# EAGLE board print_v2 (EAGLE 6.5.0)
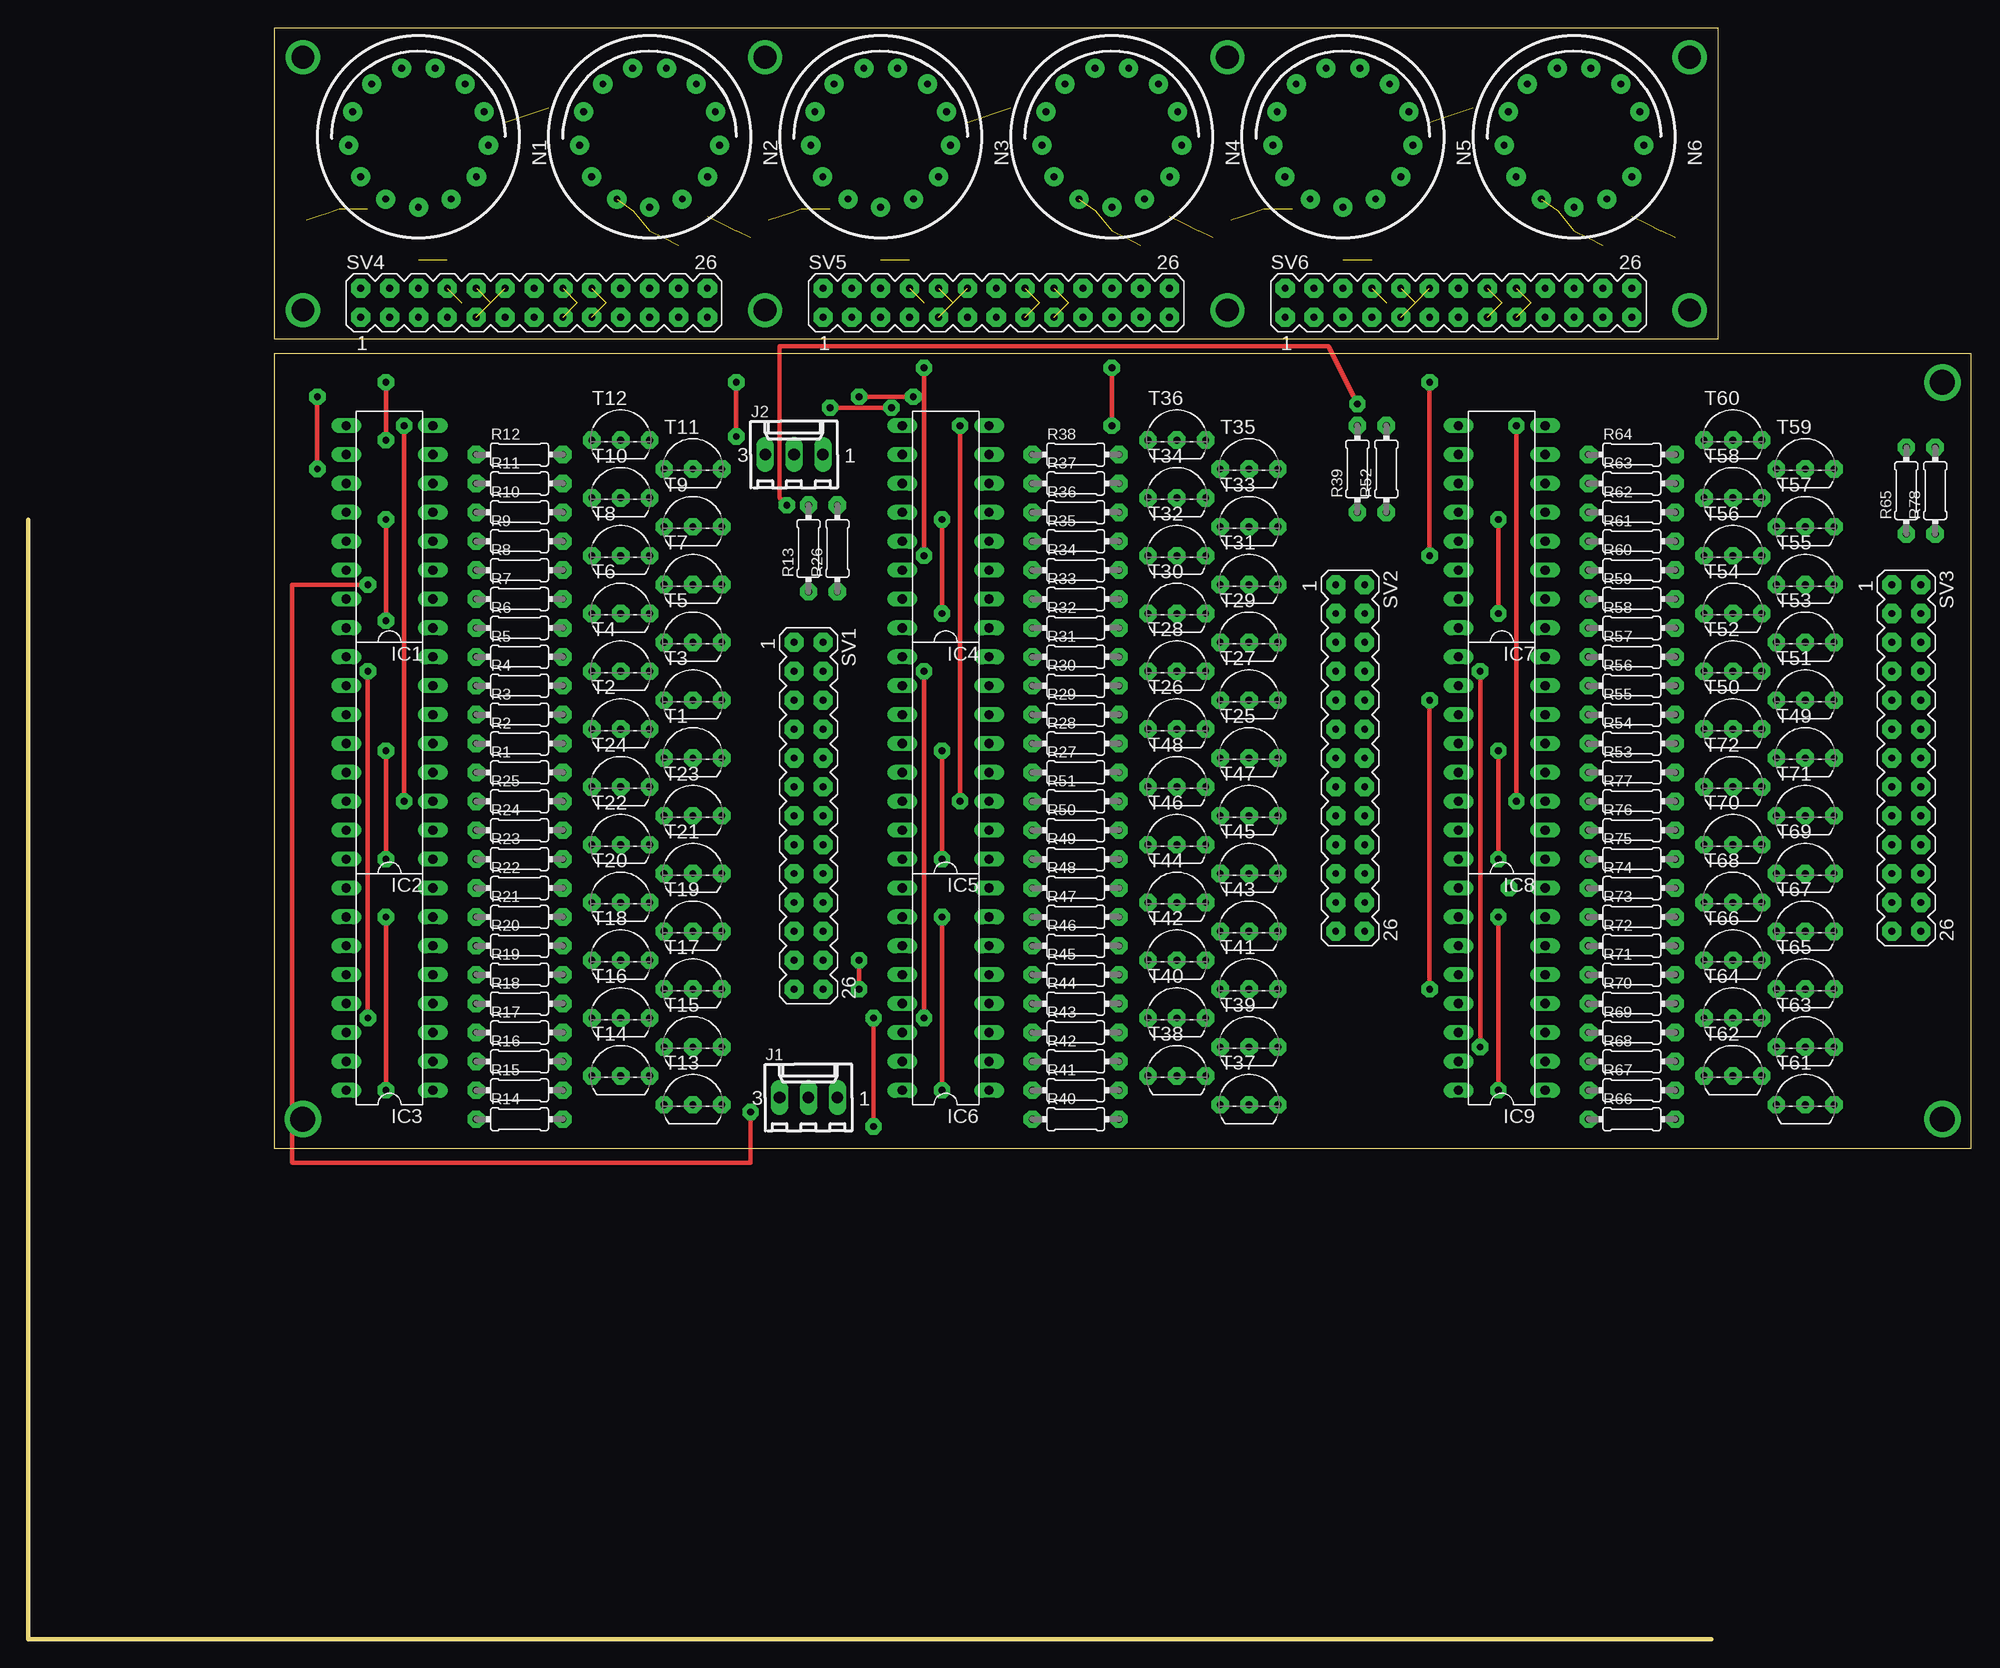
[diagram p0: board, top side]
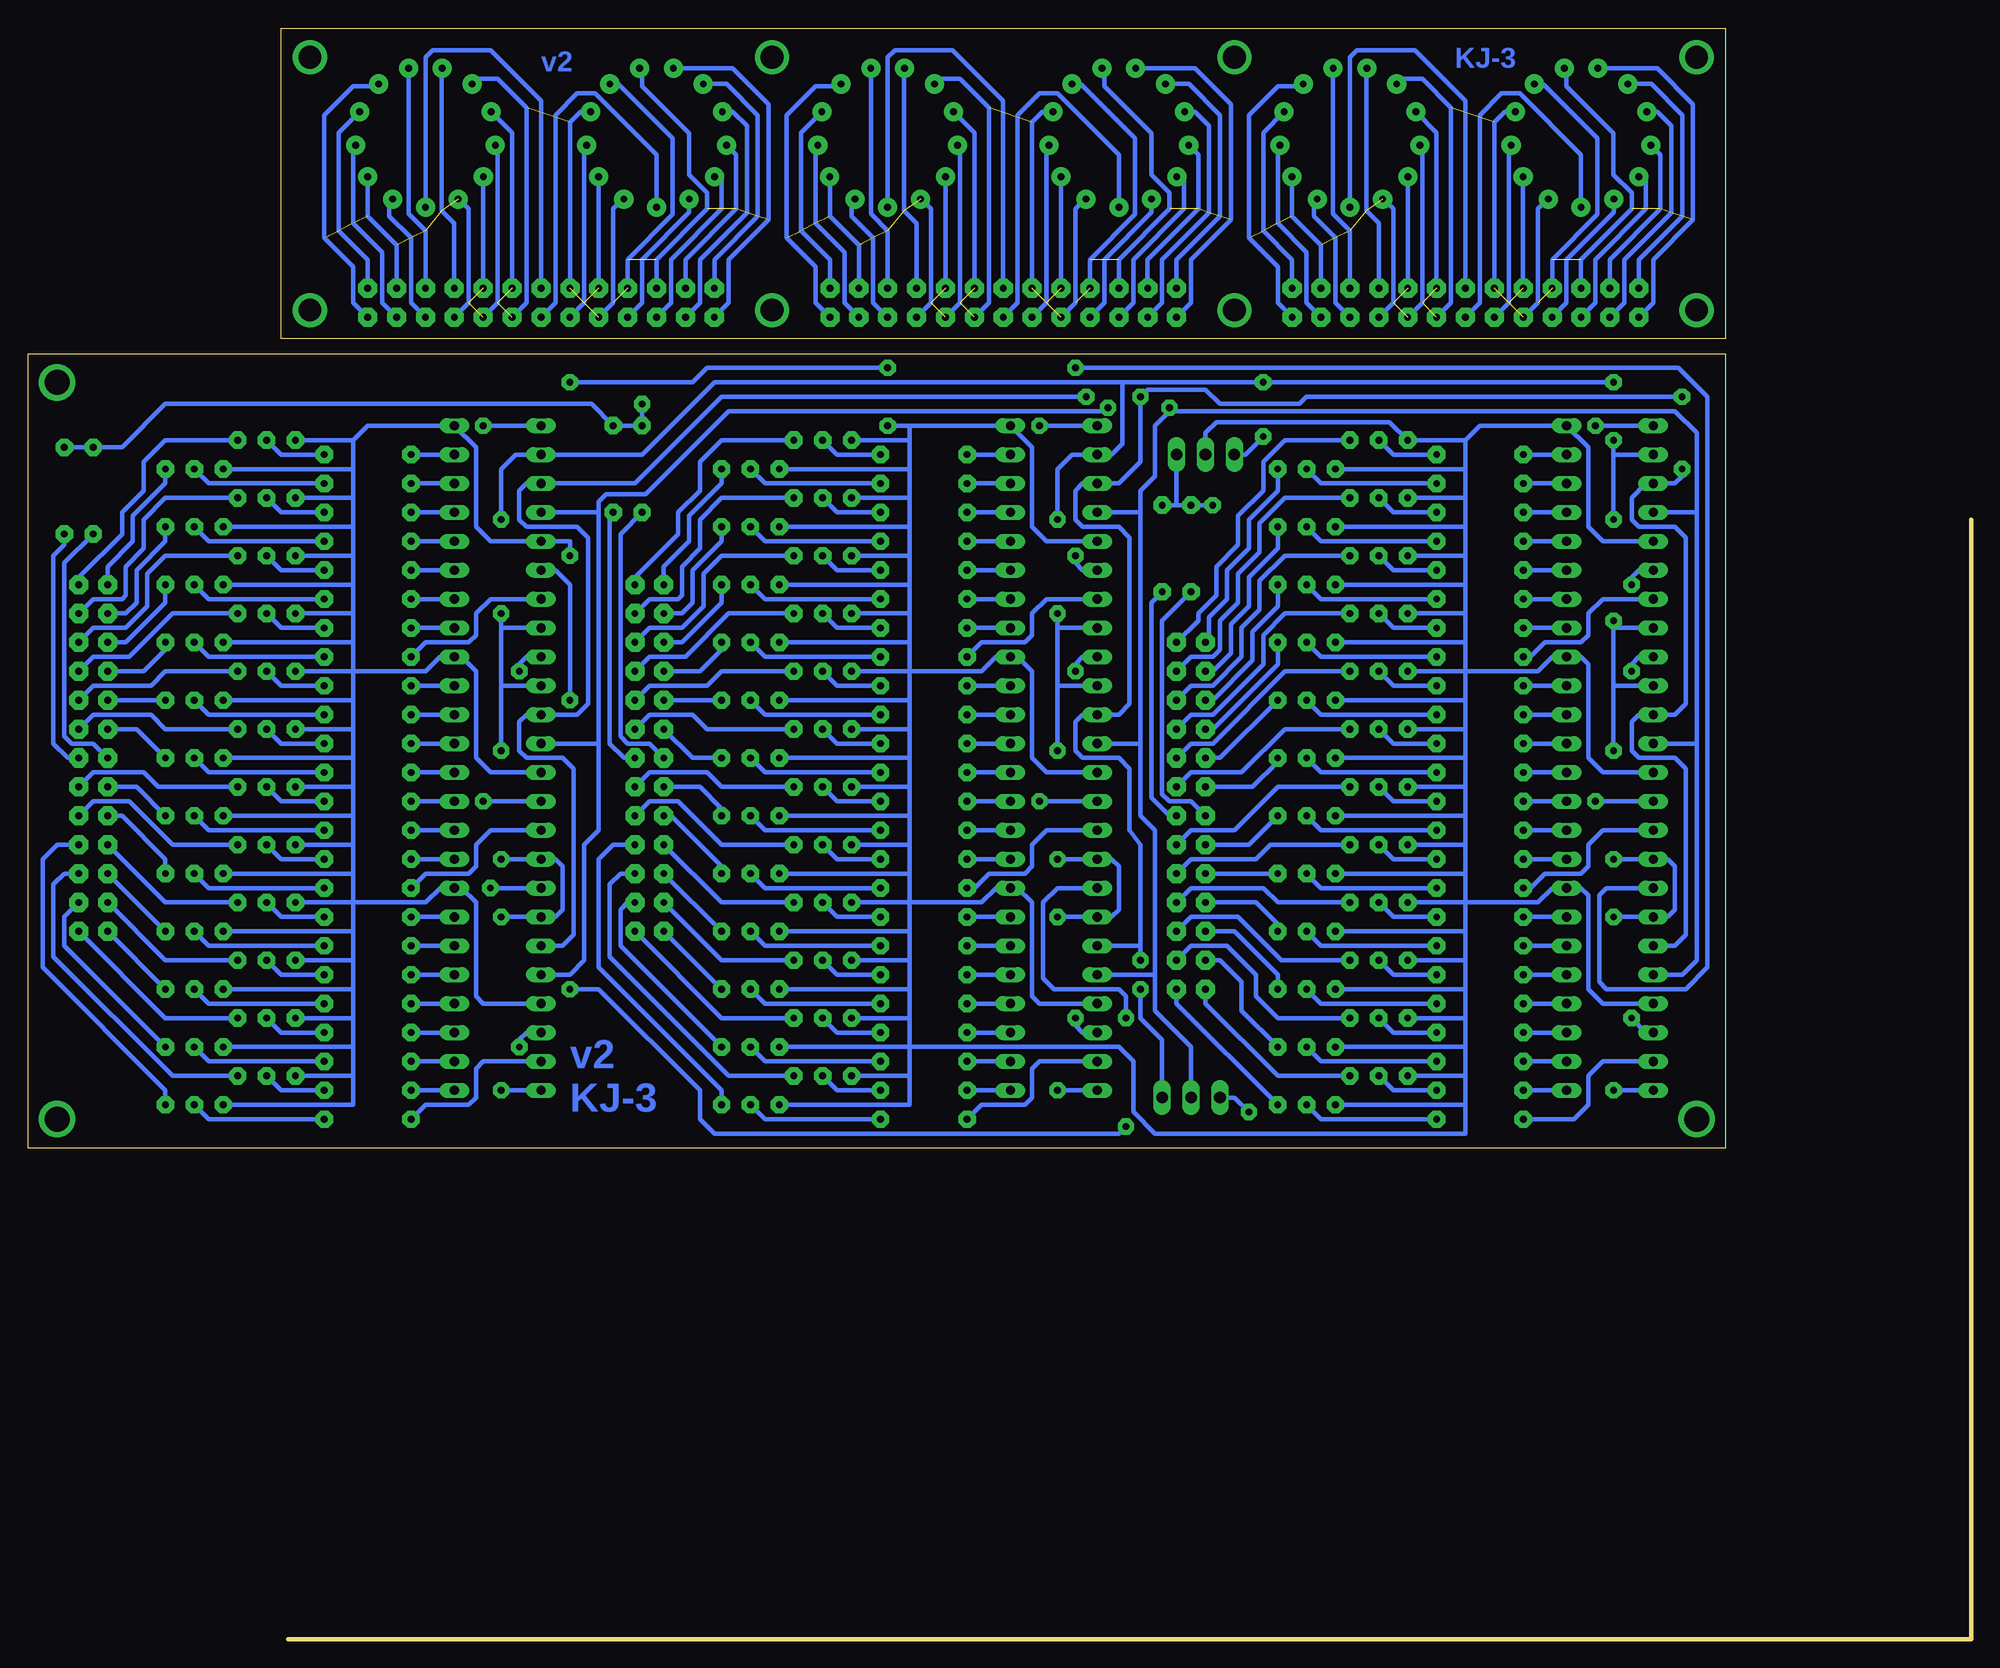
[diagram p1: board, bottom side, seen from below]

Size 170.79 x 141.59 mm. Coordinates in mm from the lower left corner, seen from the top.
Outline: 0,98.43 0,0 147.96,0
Outline: 21.59,43.18 170.79,43.18 170.79,113.02 21.59,113.02 21.59,43.18
Outline: 21.59,114.3 148.58,114.3 148.58,141.59 21.59,141.59 21.59,114.3
Copper layers (1*16): Top 0.035mm / dielectric 1.5mm / Bottom 0.035mm
Design rules "default": minimum track width 10mil, minimum drill 24mil, track to track 8mil, track to pad 8mil, pad to pad 8mil, via to via 8mil, smd to smd 8mil, copper to edge 40mil, drill to drill 8mil, minimum pad ring 10mil, minimum via ring 8mil, stop-mask expansion 4mil, vias tented up to drill 0mil, thermal gap 10mil

## Footprints (pad centres in the part's own frame; a part is rotated, then mirrored left to right if it is on the bottom)
DIL16 = drill 0.813 long: 1 -8.89,-3.81; 2 -6.35,-3.81; 3 -3.81,-3.81; 4 -1.27,-3.81; 5 1.27,-3.81; 6 3.81,-3.81; 7 6.35,-3.81; 8 8.89,-3.81; 9 8.89,3.81; 10 6.35,3.81; 11 3.81,3.81; 12 1.27,3.81; 13 -1.27,3.81; 14 -3.81,3.81; 15 -6.35,3.81; 16 -8.89,3.81
6410-03 = drill 1.016 long: 1 2.54,0; 2 0,0; 3 -2.54,0
IN-14 = drill 0.6 pad 1.676: 0 5.094,-3.516; 1 -5.094,-3.516; 2 -6.145,-0.746; 3 -5.788,2.195; 4 -4.105,4.633; 5 -1.481,6.01; 6 1.481,6.01; 7 4.105,4.633; 8 5.788,2.195; 9 6.145,-0.746; A 0,-6.19; LHDP 2.877,-5.481; RHDP -2.877,-5.481
0204/7 = drill 0.6 pad 1.524 octagon: 1 -3.81,0; 2 3.81,0
MA13-2 = drill 0.6 pad 1.676 octagon: 1 -15.24,-1.27; 2 -15.24,1.27; 3 -12.7,-1.27; 4 -12.7,1.27; 5 -10.16,-1.27; 6 -10.16,1.27; 7 -7.62,-1.27; 8 -7.62,1.27; 9 -5.08,-1.27; 10 -5.08,1.27; 11 -2.54,-1.27; 12 -2.54,1.27; 13 0,-1.27; 14 0,1.27; 15 2.54,-1.27; 16 2.54,1.27; 17 5.08,-1.27; 18 5.08,1.27; 19 7.62,-1.27; 20 7.62,1.27; 21 10.16,-1.27; 22 10.16,1.27; 23 12.7,-1.27; 24 12.7,1.27; 25 15.24,-1.27; 26 15.24,1.27
TO92-EBC = drill 0.6 pad 1.524 octagon: B 0,-1.27; C 2.54,-1.27; E -2.54,-1.27

## Placement (x,y rotation side)
IC1  74LS595N  [DIL16]  31.75,97.79 90 top
IC2  74LS595N  [DIL16]  31.75,77.47 90 top
IC3  74LS595N  [DIL16]  31.75,57.15 90 top
IC4  74LS595N  [DIL16]  80.64,97.79 90 top
IC5  74LS595N  [DIL16]  80.64,77.47 90 top
IC6  74LS595N  [DIL16]  80.64,57.15 90 top
IC7  74LS595N  [DIL16]  129.54,97.79 90 top
IC8  74LS595N  [DIL16]  129.54,77.47 90 top
IC9  74LS595N  [DIL16]  129.54,57.15 90 top
J1  22-27-2031-03  [6410-03]  68.58,47.62 0 top
J2  22-27-2031-03  [6410-03]  67.31,104.14 0 top
N1  IN-14  [IN-14]  34.29,132.08 0 top
N2  IN-14  [IN-14]  54.61,132.08 0 top
N3  IN-14  [IN-14]  74.93,132.08 0 top
N4  IN-14  [IN-14]  95.25,132.08 0 top
N5  IN-14  [IN-14]  115.57,132.08 0 top
N6  IN-14  [IN-14]  135.89,132.08 0 top
R1  [0204/7]  43.18,76.2 0 top
R2  [0204/7]  43.18,78.74 0 top
R3  [0204/7]  43.18,81.28 0 top
R4  [0204/7]  43.18,83.82 0 top
R5  [0204/7]  43.18,86.36 0 top
R6  [0204/7]  43.18,88.9 0 top
R7  [0204/7]  43.18,91.44 0 top
R8  [0204/7]  43.18,93.98 0 top
R9  [0204/7]  43.18,96.52 0 top
R10  [0204/7]  43.18,99.06 0 top
R11  [0204/7]  43.18,101.6 0 top
R12  [0204/7]  43.18,104.14 0 top
R13  [0204/7]  68.58,95.89 90 top
R14  [0204/7]  43.18,45.72 0 top
R15  [0204/7]  43.18,48.26 0 top
R16  [0204/7]  43.18,50.8 0 top
R17  [0204/7]  43.18,53.34 0 top
R18  [0204/7]  43.18,55.88 0 top
R19  [0204/7]  43.18,58.42 0 top
R20  [0204/7]  43.18,60.96 0 top
R21  [0204/7]  43.18,63.5 0 top
R22  [0204/7]  43.18,66.04 0 top
R23  [0204/7]  43.18,68.58 0 top
R24  [0204/7]  43.18,71.12 0 top
R25  [0204/7]  43.18,73.66 0 top
R26  [0204/7]  71.12,95.89 90 top
R27  [0204/7]  92.08,76.2 0 top
R28  [0204/7]  92.08,78.74 0 top
R29  [0204/7]  92.08,81.28 0 top
R30  [0204/7]  92.08,83.82 0 top
R31  [0204/7]  92.08,86.36 0 top
R32  [0204/7]  92.08,88.9 0 top
R33  [0204/7]  92.08,91.44 0 top
R34  [0204/7]  92.08,93.98 0 top
R35  [0204/7]  92.08,96.52 0 top
R36  [0204/7]  92.08,99.06 0 top
R37  [0204/7]  92.08,101.6 0 top
R38  [0204/7]  92.08,104.14 0 top
R39  [0204/7]  116.84,102.87 90 top
R40  [0204/7]  92.08,45.72 0 top
R41  [0204/7]  92.08,48.26 0 top
R42  [0204/7]  92.08,50.8 0 top
R43  [0204/7]  92.08,53.34 0 top
R44  [0204/7]  92.08,55.88 0 top
R45  [0204/7]  92.08,58.42 0 top
R46  [0204/7]  92.08,60.96 0 top
R47  [0204/7]  92.08,63.5 0 top
R48  [0204/7]  92.08,66.04 0 top
R49  [0204/7]  92.08,68.58 0 top
R50  [0204/7]  92.08,71.12 0 top
R51  [0204/7]  92.08,73.66 0 top
R52  [0204/7]  119.38,102.87 90 top
R53  [0204/7]  140.97,76.2 0 top
R54  [0204/7]  140.97,78.74 0 top
R55  [0204/7]  140.97,81.28 0 top
R56  [0204/7]  140.97,83.82 0 top
R57  [0204/7]  140.97,86.36 0 top
R58  [0204/7]  140.97,88.9 0 top
R59  [0204/7]  140.97,91.44 0 top
R60  [0204/7]  140.97,93.98 0 top
R61  [0204/7]  140.97,96.52 0 top
R62  [0204/7]  140.97,99.06 0 top
R63  [0204/7]  140.97,101.6 0 top
R64  [0204/7]  140.97,104.14 0 top
R65  [0204/7]  165.1,100.97 90 top
R66  [0204/7]  140.97,45.72 0 top
R67  [0204/7]  140.97,48.26 0 top
R68  [0204/7]  140.97,50.8 0 top
R69  [0204/7]  140.97,53.34 0 top
R70  [0204/7]  140.97,55.88 0 top
R71  [0204/7]  140.97,58.42 0 top
R72  [0204/7]  140.97,60.96 0 top
R73  [0204/7]  140.97,63.5 0 top
R74  [0204/7]  140.97,66.04 0 top
R75  [0204/7]  140.97,68.58 0 top
R76  [0204/7]  140.97,71.12 0 top
R77  [0204/7]  140.97,73.66 0 top
R78  [0204/7]  167.64,100.97 90 top
SV1  [MA13-2]  68.58,72.39 270 top
SV2  [MA13-2]  116.2,77.47 270 top
SV3  [MA13-2]  165.1,77.47 270 top
SV4  [MA13-2]  44.45,117.48 0 top
SV5  [MA13-2]  85.09,117.48 0 top
SV6  [MA13-2]  125.73,117.48 0 top
T1  [TO92-EBC]  58.42,78.74 0 top
T2  [TO92-EBC]  52.07,81.28 0 top
T3  [TO92-EBC]  58.42,83.82 0 top
T4  [TO92-EBC]  52.07,86.36 0 top
T5  [TO92-EBC]  58.42,88.9 0 top
T6  [TO92-EBC]  52.07,91.44 0 top
T7  [TO92-EBC]  58.42,93.98 0 top
T8  [TO92-EBC]  52.07,96.52 0 top
T9  [TO92-EBC]  58.42,99.06 0 top
T10  [TO92-EBC]  52.07,101.6 0 top
T11  [TO92-EBC]  58.42,104.14 0 top
T12  [TO92-EBC]  52.07,106.68 0 top
T13  [TO92-EBC]  58.42,48.26 0 top
T14  [TO92-EBC]  52.07,50.8 0 top
T15  [TO92-EBC]  58.42,53.34 0 top
T16  [TO92-EBC]  52.07,55.88 0 top
T17  [TO92-EBC]  58.42,58.42 0 top
T18  [TO92-EBC]  52.07,60.96 0 top
T19  [TO92-EBC]  58.42,63.5 0 top
T20  [TO92-EBC]  52.07,66.04 0 top
T21  [TO92-EBC]  58.42,68.58 0 top
T22  [TO92-EBC]  52.07,71.12 0 top
T23  [TO92-EBC]  58.42,73.66 0 top
T24  [TO92-EBC]  52.07,76.2 0 top
T25  [TO92-EBC]  107.31,78.74 0 top
T26  [TO92-EBC]  100.97,81.28 0 top
T27  [TO92-EBC]  107.31,83.82 0 top
T28  [TO92-EBC]  100.97,86.36 0 top
T29  [TO92-EBC]  107.31,88.9 0 top
T30  [TO92-EBC]  100.97,91.44 0 top
T31  [TO92-EBC]  107.31,93.98 0 top
T32  [TO92-EBC]  100.97,96.52 0 top
T33  [TO92-EBC]  107.31,99.06 0 top
T34  [TO92-EBC]  100.97,101.6 0 top
T35  [TO92-EBC]  107.31,104.14 0 top
T36  [TO92-EBC]  100.97,106.68 0 top
T37  [TO92-EBC]  107.31,48.26 0 top
T38  [TO92-EBC]  100.97,50.8 0 top
T39  [TO92-EBC]  107.31,53.34 0 top
T40  [TO92-EBC]  100.97,55.88 0 top
T41  [TO92-EBC]  107.31,58.42 0 top
T42  [TO92-EBC]  100.97,60.96 0 top
T43  [TO92-EBC]  107.31,63.5 0 top
T44  [TO92-EBC]  100.97,66.04 0 top
T45  [TO92-EBC]  107.31,68.58 0 top
T46  [TO92-EBC]  100.97,71.12 0 top
T47  [TO92-EBC]  107.31,73.66 0 top
T48  [TO92-EBC]  100.97,76.2 0 top
T49  [TO92-EBC]  156.21,78.74 0 top
T50  [TO92-EBC]  149.86,81.28 0 top
T51  [TO92-EBC]  156.21,83.82 0 top
T52  [TO92-EBC]  149.86,86.36 0 top
T53  [TO92-EBC]  156.21,88.9 0 top
T54  [TO92-EBC]  149.86,91.44 0 top
T55  [TO92-EBC]  156.21,93.98 0 top
T56  [TO92-EBC]  149.86,96.52 0 top
T57  [TO92-EBC]  156.21,99.06 0 top
T58  [TO92-EBC]  149.86,101.6 0 top
T59  [TO92-EBC]  156.21,104.14 0 top
T60  [TO92-EBC]  149.86,106.68 0 top
T61  [TO92-EBC]  156.21,48.26 0 top
T62  [TO92-EBC]  149.86,50.8 0 top
T63  [TO92-EBC]  156.21,53.34 0 top
T64  [TO92-EBC]  149.86,55.88 0 top
T65  [TO92-EBC]  156.21,58.42 0 top
T66  [TO92-EBC]  149.86,60.96 0 top
T67  [TO92-EBC]  156.21,63.5 0 top
T68  [TO92-EBC]  149.86,66.04 0 top
T69  [TO92-EBC]  156.21,68.58 0 top
T70  [TO92-EBC]  149.86,71.12 0 top
T71  [TO92-EBC]  156.21,73.66 0 top
T72  [TO92-EBC]  149.86,76.2 0 top

## Library data of the parts
IC1-IC9 = 74xx-us
J1 J2 = con-molex; OC_FARNELL: unknown; OC_NEWARK: unknown
N1-N6 = russian-nixies
R1-R78 = resistor
SV1-SV6 = con-lstb; OC_FARNELL: unknown; OC_NEWARK: unknown
T1-T72 = transistor

## Nets
GND: IC1.8 IC1.13 IC2.8 IC2.13 IC3.8 IC3.13 IC4.8 IC4.13 IC5.8 IC5.13 IC6.8 IC6.13 IC7.8 IC7.13 IC8.8 IC8.13 IC9.8 IC9.13 J2.2 T1.E T2.E T3.E T4.E T5.E T6.E T7.E T8.E T9.E T10.E T11.E T12.E T13.E T14.E T15.E T16.E T17.E T18.E T19.E T20.E T21.E T22.E T23.E T24.E T25.E T26.E T27.E T28.E T29.E T30.E T31.E T32.E T33.E T34.E T35.E T36.E T37.E T38.E T39.E T40.E T41.E T42.E T43.E T44.E T45.E T46.E T47.E T48.E T49.E T50.E T51.E T52.E T53.E T54.E T55.E T56.E T57.E T58.E T59.E T60.E T61.E T62.E T63.E T64.E T65.E T66.E T67.E T68.E T69.E T70.E T71.E T72.E
HV: J2.1 R13.2 R26.2 R39.2 R52.2 R65.2 R78.2
N$1: R12.2 T12.B
N$2: R11.2 T11.B
N$3: R10.2 T10.B
N$4: R9.2 T9.B
N$5: R8.2 T8.B
N$6: R7.2 T7.B
N$7: R6.2 T6.B
N$8: R5.2 T5.B
N$9: R4.2 T4.B
N$10: R3.2 T3.B
N$11: R2.2 T2.B
N$12: R1.2 T1.B
N$13: SV1.11 T1.C
N$14: R38.2 T36.B
N$15: R37.2 T35.B
N$16: SV1.3 T9.C
N$17: SV1.6 T8.C
N$18: SV1.5 T7.C
N$19: R36.2 T34.B
N$20: SV1.12 T2.C
N$21: SV1.9 T3.C
N$22: SV1.8 T6.C
N$23: SV1.7 T5.C
N$24: SV1.10 T4.C
N$25: R26.1 SV1.14
N$26: R25.2 T24.B
N$27: R24.2 T23.B
N$28: R23.2 T22.B
N$29: R22.2 T21.B
N$30: R21.2 T20.B
N$31: R20.2 T19.B
N$32: R19.2 T18.B
N$33: R18.2 T17.B
N$34: R17.2 T16.B
N$35: R16.2 T15.B
N$36: R15.2 T14.B
N$37: R14.2 T13.B
N$38: SV1.16 T24.C
N$39: SV1.15 T23.C
N$40: SV1.18 T22.C
N$41: SV1.17 T21.C
N$42: SV1.20 T20.C
N$43: SV1.19 T19.C
N$44: SV1.26 T13.C
N$45: SV1.25 T14.C
N$46: SV1.23 T15.C
N$47: SV1.22 T18.C
N$48: SV1.21 T17.C
N$49: SV1.24 T16.C
N$51: R13.1 SV1.13
N$52: IC1.9 IC2.14
N$53: IC2.9 IC3.14
N$54: IC3.9 IC4.14
N$56: R35.2 T33.B
N$57: SV1.2 T12.C
N$60: SV1.1 T11.C
N$61: SV1.4 T10.C
N$62: R34.2 T32.B
N$63: R33.2 T31.B
N$64: R32.2 T30.B
N$65: R31.2 T29.B
N$66: R30.2 T28.B
N$67: R29.2 T27.B
N$68: R28.2 T26.B
N$69: R27.2 T25.B
N$70: SV2.3 T33.C
N$71: SV2.6 T32.C
N$72: SV2.5 T31.C
N$73: SV2.12 T26.C
N$74: SV2.9 T27.C
N$75: IC1.7 R12.1
N$76: IC1.6 R11.1
N$77: IC1.5 R10.1
N$78: IC1.4 R9.1
N$79: IC1.3 R8.1
N$80: IC1.2 R7.1
N$81: IC1.1 R6.1
N$82: IC1.15 R5.1
N$83: SV2.8 T30.C
N$84: IC2.7 R4.1
N$85: IC2.6 R3.1
N$86: IC2.5 R2.1
N$87: IC2.4 R1.1
N$88: IC2.3 R25.1
N$89: IC2.2 R24.1
N$90: IC2.1 R23.1
N$91: IC2.15 R22.1
N$92: IC3.7 R21.1
N$93: IC3.6 R20.1
N$94: IC3.5 R19.1
N$95: IC3.4 R18.1
N$96: IC3.3 R17.1
N$97: IC3.2 R16.1
N$98: IC3.1 R15.1
N$99: IC3.15 R14.1
N$100: SV2.7 T29.C
N$101: SV2.10 T28.C
N$102: R51.2 T48.B
N$103: R50.2 T47.B
N$104: R49.2 T46.B
N$105: R48.2 T45.B
N$106: R47.2 T44.B
N$107: R46.2 T43.B
N$108: R45.2 T42.B
N$109: R44.2 T41.B
N$110: R43.2 T40.B
N$111: R42.2 T39.B
N$112: R41.2 T38.B
N$113: R40.2 T37.B
N$114: SV2.16 T48.C
N$115: SV2.15 T47.C
N$116: SV2.18 T46.C
N$117: SV2.17 T45.C
N$118: SV2.19 T44.C
N$119: SV2.21 T43.C
N$120: SV2.20 T37.C
N$121: SV2.22 T38.C
N$122: SV2.24 T39.C
N$123: SV2.23 T42.C
N$124: SV2.25 T41.C
N$125: SV2.26 T40.C
N$126: IC4.7 R38.1
N$127: IC4.6 R37.1
N$128: IC4.5 R36.1
N$129: IC4.4 R35.1
N$130: IC4.3 R34.1
N$131: IC4.2 R33.1
N$132: IC4.1 R32.1
N$133: IC4.15 R31.1
N$134: IC5.7 R30.1
N$135: IC5.6 R29.1
N$136: IC5.5 R28.1
N$137: IC5.4 R27.1
N$138: IC5.3 R51.1
N$139: IC5.2 R50.1
N$140: IC5.1 R49.1
N$141: IC5.15 R48.1
N$142: IC6.7 R47.1
N$143: IC6.6 R46.1
N$144: IC6.5 R45.1
N$145: IC6.4 R44.1
N$146: IC6.3 R43.1
N$147: IC6.2 R42.1
N$148: IC6.1 R41.1
N$149: IC6.15 R40.1
N$150: N1.A SV4.13
N$151: IC4.9 IC5.14
N$152: IC5.9 IC6.14
N$153: IC6.9 IC7.14
N$154: N2.A SV4.14
N$155: N1.0 N1.1 N1.2 N1.3 N1.4 N1.5 N1.6 N1.7 N1.8 N1.9 N1.LHDP N1.RHDP N2.0 N2.1 N2.2 N2.3 N2.4 N2.5 N2.6 N2.7 N2.8 N2.9 N2.LHDP N2.RHDP SV4.1 SV4.2 SV4.3 SV4.4 SV4.5 SV4.6 SV4.7 SV4.8 SV4.9 SV4.10 SV4.11 SV4.12 SV4.15 SV4.16 SV4.17 SV4.18 SV4.19 SV4.20 SV4.21 SV4.22 SV4.23 SV4.24 SV4.25 SV4.26
N$157: SV2.11 T25.C
N$158: R52.1 SV2.14
N$159: R39.1 SV2.13
N$160: SV2.2 T36.C
N$161: SV2.1 T35.C
N$162: SV2.4 T34.C
N$163: R64.2 T60.B
N$164: R63.2 T59.B
N$165: R62.2 T58.B
N$166: R61.2 T57.B
N$167: R60.2 T56.B
N$168: R59.2 T55.B
N$169: R58.2 T54.B
N$170: R57.2 T53.B
N$171: R56.2 T52.B
N$172: R55.2 T51.B
N$173: R54.2 T50.B
N$174: R53.2 T49.B
N$175: SV3.3 T57.C
N$176: SV3.6 T56.C
N$177: SV3.5 T55.C
N$178: SV3.12 T50.C
N$179: SV3.9 T51.C
N$180: SV3.8 T54.C
N$181: SV3.7 T53.C
N$182: SV3.10 T52.C
N$183: R77.2 T72.B
N$184: R76.2 T71.B
N$185: R75.2 T70.B
N$186: R74.2 T69.B
N$187: R73.2 T68.B
N$188: R72.2 T67.B
N$189: R71.2 T66.B
N$190: R70.2 T65.B
N$191: R69.2 T64.B
N$192: R68.2 T63.B
N$193: R67.2 T62.B
N$194: R66.2 T61.B
N$195: SV3.16 T72.C
N$196: SV3.15 T71.C
N$197: SV3.18 T70.C
N$198: SV3.17 T69.C
N$199: SV3.19 T68.C
N$200: SV3.21 T67.C
N$201: SV3.20 T61.C
N$202: SV3.22 T62.C
N$203: SV3.24 T63.C
N$204: SV3.23 T66.C
N$205: SV3.25 T65.C
N$206: SV3.26 T64.C
N$207: IC7.7 R64.1
N$208: IC7.6 R63.1
N$209: IC7.5 R62.1
N$210: IC7.4 R61.1
N$211: IC7.3 R60.1
N$212: IC7.2 R59.1
N$213: IC7.1 R58.1
N$214: IC7.15 R57.1
N$215: IC8.7 R56.1
N$216: IC8.6 R55.1
N$217: IC8.5 R54.1
N$218: IC8.4 R53.1
N$219: IC8.3 R77.1
N$220: IC8.2 R76.1
N$221: IC8.1 R75.1
N$222: IC8.15 R74.1
N$223: IC9.7 R73.1
N$224: IC9.6 R72.1
N$225: IC9.5 R71.1
N$226: IC9.4 R70.1
N$227: IC9.3 R69.1
N$228: IC9.2 R68.1
N$229: IC9.1 R67.1
N$230: IC9.15 R66.1
N$232: IC7.9 IC8.14
N$233: IC8.9 IC9.14
N$236: N3.A SV5.13
N$237: N4.A SV5.14
N$238: SV3.11 T49.C
N$239: R78.1 SV3.14
N$240: R65.1 SV3.13
N$241: SV3.2 T60.C
N$242: SV3.1 T59.C
N$243: SV3.4 T58.C
N$244: N3.0 N3.1 N3.2 N3.3 N3.4 N3.5 N3.6 N3.7 N3.8 N3.9 N3.LHDP N3.RHDP N4.0 N4.1 N4.2 N4.3 N4.4 N4.5 N4.6 N4.7 N4.8 N4.9 N4.LHDP N4.RHDP SV5.1 SV5.2 SV5.3 SV5.4 SV5.5 SV5.6 SV5.7 SV5.8 SV5.9 SV5.10 SV5.11 SV5.12 SV5.15 SV5.16 SV5.17 SV5.18 SV5.19 SV5.20 SV5.21 SV5.22 SV5.23 SV5.24 SV5.25 SV5.26
N$247: N5.A SV6.13
N$248: N6.A SV6.14
N$249: N5.0 N5.1 N5.2 N5.3 N5.4 N5.5 N5.6 N5.7 N5.8 N5.9 N5.LHDP N5.RHDP N6.0 N6.1 N6.2 N6.3 N6.4 N6.5 N6.6 N6.7 N6.8 N6.9 N6.LHDP N6.RHDP SV6.1 SV6.2 SV6.3 SV6.4 SV6.5 SV6.6 SV6.7 SV6.8 SV6.9 SV6.10 SV6.11 SV6.12 SV6.15 SV6.16 SV6.17 SV6.18 SV6.19 SV6.20 SV6.21 SV6.22 SV6.23 SV6.24 SV6.25 SV6.26
RCK: IC1.12 IC2.12 IC3.12 IC4.12 IC5.12 IC6.12 IC7.12 IC8.12 IC9.12 J1.2
SCK: IC1.11 IC2.11 IC3.11 IC4.11 IC5.11 IC6.11 IC7.11 IC8.11 IC9.11 J1.1
SER: IC1.14 J1.3
VCC: IC1.10 IC1.16 IC2.10 IC2.16 IC3.10 IC3.16 IC4.10 IC4.16 IC5.10 IC5.16 IC6.10 IC6.16 IC7.10 IC7.16 IC8.10 IC8.16 IC9.10 IC9.16 J2.3

## Tracks (layer width: path | path; a pad name or v marks a point on that pad's centre or on a via)
GND  (via drill 0.6 pad 1.42)
  Top 0.406: v95.25,111.76 v95.25,106.68 | v123.19,95.25 v123.19,110.49
  Bottom 0.406: 44.45,85.09 38.1,85.09 36.83,86.36 IC2.8 34.29,86.36 33.66,85.73 33.66,77.47 32.38,76.2 IC2.13 | T13.E 44.45,46.99 | 44.45,46.99 44.45,49.53 | 44.45,49.53 44.45,52.07 | 44.45,52.07 44.45,54.61 | 44.45,54.61 44.45,57.15 | 44.45,57.15 44.45,59.69 | 44.45,59.69 44.45,62.23 | 44.45,62.23 44.45,64.77 | 44.45,64.77 44.45,67.31 | 44.45,67.31 44.45,69.85 | 44.45,69.85 44.45,72.39 | 44.45,72.39 44.45,74.93 | 44.45,74.93 44.45,77.47 | 44.45,77.47 44.45,80.01 | 44.45,80.01 44.45,82.55 | 44.45,82.55 44.45,85.09 | T4.E 44.45,85.09 | 44.45,85.09 44.45,87.63 | 44.45,87.63 44.45,90.17 | 44.45,90.17 44.45,92.71 | 44.45,92.71 44.45,95.25 | 44.45,95.25 44.45,97.79 | 44.45,97.79 44.45,100.33 | 44.45,100.33 44.45,102.87 | 44.45,102.87 44.45,105.41 | 44.45,105.41 T12.E 51.12,107 66.36,107 67.31,106.05 J2.2 | T10.E 44.45,100.33 | T8.E 44.45,95.25 | T6.E 44.45,90.17 | T11.E 44.45,102.87 | T9.E 44.45,97.79 | T7.E 44.45,92.71 | T5.E 44.45,87.63 | T3.E 44.45,82.55 | T2.E 44.45,80.01 | T1.E 44.45,77.47 | T23.E 44.45,72.39 | T24.E 44.45,74.93 | T21.E 44.45,67.31 | T19.E 44.45,62.23 | T20.E 44.45,64.77 | T17.E 44.45,57.15 | T18.E 44.45,59.69 | T16.E 44.45,54.61 | T15.E 44.45,52.07 | T14.E 44.45,49.53 | 44.45,105.41 43.18,106.68 IC1.8 33.66,104.78 33.66,97.79 32.38,96.52 IC1.13 | IC3.13 32.38,55.88 33.66,57.15 33.66,65.41 34.29,66.04 IC3.8 36.83,66.04 38.1,64.77 44.45,64.77 | T22.E 44.45,69.85 | 93.34,52.07 74.93,52.07 73.66,50.8 73.66,46.35 71.75,44.45 44.45,44.45 44.45,46.99 | 93.34,106.68 IC4.8 82.55,104.78 82.55,97.79 81.28,96.52 IC4.13 | 93.34,106.68 93.34,105.41 | 93.34,105.41 T36.E | T35.E 93.34,102.87 | 93.34,102.87 93.34,105.41 | T33.E 93.34,97.79 | 93.34,97.79 93.34,100.33
  Bottom 0.406: 93.34,100.33 93.34,102.87 | T34.E 93.34,100.33 | T32.E 93.34,95.25 | 93.34,95.25 93.34,97.79 | 93.34,95.25 93.34,92.71 | 93.34,92.71 T31.E | 93.34,92.71 93.34,90.17 | 93.34,90.17 T30.E | 93.34,90.17 93.34,87.63 | 93.34,87.63 T29.E | 93.34,87.63 93.34,85.09 | 93.34,85.09 T28.E | 93.34,85.09 93.34,82.55 | 93.34,82.55 T27.E | T25.E 93.34,77.47 | 93.34,77.47 93.34,80.01 | 93.34,80.01 93.34,82.55 | T26.E 93.34,80.01 | T47.E 93.34,72.39 | 93.34,72.39 93.34,74.93 | 93.34,74.93 93.34,77.47 | T48.E 93.34,74.93 | T46.E 93.34,69.85 | 93.34,69.85 93.34,72.39 | T45.E 93.34,67.31 | 93.34,67.31 93.34,69.85 | T43.E 93.34,62.23 | 93.34,62.23 93.34,64.77 | 93.34,64.77 93.34,67.31 | T44.E 93.34,64.77 | T42.E 93.34,59.69 | 93.34,59.69 93.34,62.23 | T41.E 93.34,57.15 | 93.34,57.15 93.34,59.69 | T40.E 93.34,54.61 | 93.34,54.61 93.34,57.15 | T39.E 93.34,52.07 | 93.34,52.07 93.34,54.61 | T38.E 93.34,49.53 | T37.E 93.34,46.99 93.34,49.53 | 93.34,85.09 87,85.09 85.72,86.36 IC5.8 83.82,86.36 82.55,85.09 82.55,77.47 81.28,76.2 IC5.13 | 93.34,64.77 87,64.77 85.72,66.04 IC6.8 83.82,66.04 82.55,64.77 82.55,56.52 81.92,55.88 IC6.13 | 93.34,52.07 93.34,49.53 | T60.E 142.24,105.41 | 142.24,105.41 142.24,102.87 | 142.24,102.87 T59.E | 142.24,105.41 140.97,106.68 IC7.8 131.44,104.78 131.44,97.79 130.18,96.52 IC7.13 123.19,96.52 v123.19,95.25 | T58.E 142.24,100.33 | 142.24,100.33 142.24,102.87 | T57.E 142.24,97.79 | 142.24,97.79 142.24,100.33 | T56.E 142.24,95.25 | 142.24,95.25 142.24,97.79 | T55.E 142.24,92.71 | 142.24,92.71 142.24,95.25 | T54.E 142.24,90.17 | 142.24,90.17 142.24,92.71 | T53.E 142.24,87.63 | 142.24,87.63 142.24,90.17 | T52.E 142.24,85.09 | 142.24,85.09 142.24,87.63 | T51.E 142.24,82.55
  Bottom 0.406: 142.24,82.55 142.24,85.09 | T50.E 142.24,80.01 | 142.24,80.01 142.24,82.55 | T49.E 142.24,77.47 | 142.24,77.47 142.24,80.01 | T72.E 142.24,74.93 | 142.24,74.93 142.24,77.47 | T71.E 142.24,72.39 | 142.24,72.39 142.24,74.93 | T70.E 142.24,69.85 | 142.24,69.85 142.24,72.39 | T69.E 142.24,67.31 | 142.24,67.31 142.24,69.85 | T68.E 142.24,64.77 | 142.24,64.77 142.24,67.31 | T67.E 142.24,62.23 | 142.24,62.23 142.24,64.77 | T66.E 142.24,59.69 | 142.24,59.69 142.24,62.23 | T65.E 142.24,57.15 | 142.24,57.15 142.24,59.69 | T64.E 142.24,54.61 | 142.24,54.61 142.24,57.15 | T63.E 142.24,52.07 | 142.24,52.07 142.24,54.61 | T62.E 142.24,49.53 | 142.24,49.53 142.24,52.07 | T61.E 142.24,46.99 142.24,49.53 | 142.24,85.09 135.89,85.09 134.62,86.36 IC8.8 132.72,86.36 131.44,85.09 131.44,77.47 130.18,76.2 IC8.13 | 142.24,64.77 135.89,64.77 134.62,66.04 IC9.8 132.72,66.04 131.44,64.77 131.44,56.52 130.81,55.88 IC9.13 | 93.34,106.68 v95.25,106.68 | v95.25,111.76 111.12,111.76 112.39,110.49 v123.19,110.49
HV  (via drill 0.6 pad 1.42)
  Top 0.406: v116.84,108.59 114.3,113.67 66.04,113.67 66.04,100.33 v66.67,99.7
  Bottom 0.406: J2.1 69.85,99.7 | 69.85,99.7 R13.2 | 69.85,99.7 R26.2 v66.67,99.7 | v116.84,108.59 R39.2 R52.2 121.28,108.59 158.75,108.59 162.56,104.78 R65.2 R78.2
N$1
  Bottom 0.406: T12.B 50.8,104.14 R12.2
N$2
  Bottom 0.406: R11.2 57.15,101.6 T11.B
N$3
  Bottom 0.406: T10.B 50.8,99.06 R10.2
N$4
  Bottom 0.406: T9.B 57.15,96.52 R9.2
N$5
  Bottom 0.406: T8.B 50.8,93.98 R8.2
N$6
  Bottom 0.406: T7.B 57.15,91.44 R7.2
N$7
  Bottom 0.406: T6.B 50.8,88.9 R6.2
N$8
  Bottom 0.406: T5.B 57.15,86.36 R5.2
N$9
  Bottom 0.406: T4.B 50.8,83.82 R4.2
N$10
  Bottom 0.406: T3.B 57.15,81.28 R3.2
N$11
  Bottom 0.406: T2.B 50.8,78.74 R2.2
N$12
  Bottom 0.406: T1.B 57.15,76.2 R1.2
N$13
  Bottom 0.406: T1.C 60.96,77.15 63.18,74.93 SV1.11
N$14
  Bottom 0.406: R38.2 99.69,104.14 T36.B
N$15
  Bottom 0.406: R37.2 106.05,101.6 T35.B
N$16
  Bottom 0.406: T9.C 60.96,95.89 63.5,93.34 63.5,90.81 65.09,89.22 65.09,86.68 66.67,85.09 SV1.3
N$17
  Bottom 0.406: T8.C 60.33,95.25 62.55,93.03 62.55,90.49 64.14,88.9 64.14,86.36 66.67,83.82 68.58,83.82 SV1.6
N$18
  Bottom 0.406: T7.C 60.96,90.81 63.18,88.58 63.18,86.04 66.67,82.55 SV1.5
N$19
  Bottom 0.406: R36.2 99.69,99.06 T34.B
N$20
  Bottom 0.406: T2.C 60.33,80.01 64.14,76.2 68.58,76.2 SV1.12
N$21
  Bottom 0.406: T3.C 66.04,77.47 SV1.9
N$22
  Bottom 0.406: T6.C 60.33,90.17 62.23,88.27 62.23,85.73 66.67,81.28 68.58,81.28 SV1.8
N$23
  Bottom 0.406: T5.C 60.96,85.73 66.67,80.01 SV1.7 66.99,80.01
N$24
  Bottom 0.406: T4.C 60.33,85.09 66.67,78.74 68.58,78.74 SV1.10
N$25
  Bottom 0.406: SV1.14 70.48,72.39 72.07,73.98 72.07,91.12 R26.1
N$26
  Bottom 0.406: T24.B 50.8,73.66 R25.2
N$27
  Bottom 0.406: T23.B 57.15,71.12 R24.2
N$28
  Bottom 0.406: T22.B 50.8,68.58 R23.2
N$29
  Bottom 0.406: T21.B 57.15,66.04 R22.2
N$30
  Bottom 0.406: T20.B 50.8,63.5 R21.2
N$31
  Bottom 0.406: T19.B 57.15,60.96 R20.2
N$32
  Bottom 0.406: T18.B 50.8,58.42 R19.2
N$33
  Bottom 0.406: T17.B 57.15,55.88 R18.2
N$34
  Bottom 0.406: T16.B 50.8,53.34 R17.2
N$35
  Bottom 0.406: T15.B 57.15,50.8 R16.2
N$36
  Bottom 0.406: T14.B 50.8,48.26 R15.2
N$37
  Bottom 0.406: T13.B 57.15,45.72 R14.2
N$38
  Bottom 0.406: T24.C 60.96,74.93 64.77,71.12 68.58,71.12 SV1.16
N$39
  Bottom 0.406: T23.C 63.5,69.85 SV1.15
N$40
  Bottom 0.406: T22.C 61.59,69.85 62.87,68.58 68.58,68.58 SV1.18
N$41
  Bottom 0.406: T21.C SV1.17
N$42
  Bottom 0.406: T20.C 60.96,64.77 62.23,66.04 68.58,66.04 SV1.20
N$43
  Bottom 0.406: T19.C 60.96,62.86 62.87,64.77 SV1.19
N$44
  Bottom 0.406: T13.C 69.85,55.88 SV1.26
N$45
  Bottom 0.406: T14.C 60.96,49.53 67.31,55.88 SV1.25
N$46
  Bottom 0.406: T15.C 64.14,55.24 64.14,57.78 66.04,59.69 SV1.23
N$47
  Bottom 0.406: T18.C 60.64,59.69 64.45,63.5 68.58,63.5 SV1.22
N$48
  Bottom 0.406: T17.C 60.96,58.42 64.77,62.23 SV1.21
N$49
  Bottom 0.406: T16.C 60.96,54.61 62.87,56.52 62.87,58.42 65.41,60.96 68.58,60.96 SV1.24
N$50  (via drill 0.6 pad 1.42)
  Bottom 0.406: v130.18,66.04 125.73,66.04
N$51
  Bottom 0.406: R13.1 71.12,89.54 71.12,74.3 70.48,73.66 68.58,73.66 SV1.13
N$52  (via drill 0.6 pad 1.42)
  Top 0.406: v33.02,106.68 v33.02,73.66
  Bottom 0.406: IC1.9 v33.02,106.68 | v33.02,73.66 IC2.14
N$53  (via drill 0.6 pad 1.42)
  Top 0.406: v29.84,85.09 v29.84,54.61
  Bottom 0.406: IC3.14 28.57,53.34 v29.84,54.61 | IC2.9 29.21,86.36 29.84,85.73 v29.84,85.09
N$54  (via drill 0.6 pad 1.42)
  Top 0.406: v78.74,95.25 v78.74,111.76
  Bottom 0.406: IC3.9 32.07,66.04 32.7,65.41 32.7,57.78 32.07,57.15 25.08,57.15 23.18,59.05 23.18,109.22 25.72,111.76 v78.74,111.76 | IC4.14 78.11,93.98 78.74,94.62 v78.74,95.25
N$55  (via drill 2.2)
  other vias: 24.13,45.72
N$56
  Bottom 0.406: R35.2 106.05,96.52 T33.B
N$57
  Bottom 0.406: T12.C 60.33,105.41 62.23,103.51 62.23,100.97 64.45,98.74 64.45,96.2 66.36,94.3 66.36,91.76 67.94,90.17 67.94,89.54 SV1.2
N$58  (via drill 2.2)
  other vias: 168.28,45.72
N$59  (via drill 2.2)
  other vias: 168.28,110.49
N$60
  Bottom 0.406: T11.C 60.96,100.97 63.5,98.43 63.5,95.89 65.41,93.98 65.41,91.44 66.99,89.85 66.99,87.95 SV1.1
N$61
  Bottom 0.406: T10.C 60.33,100.33 62.55,98.11 62.55,95.57 64.45,93.66 64.45,91.12 66.04,89.54 66.04,87 66.67,86.36 68.58,86.36 SV1.4
N$62
  Bottom 0.406: R34.2 99.69,93.98 T32.B
N$63
  Bottom 0.406: R33.2 106.05,91.44 T31.B
N$64
  Bottom 0.406: R32.2 99.69,88.9 T30.B
N$65
  Bottom 0.406: R31.2 106.05,86.36 T29.B
N$66
  Bottom 0.406: R30.2 99.69,83.82 T28.B
N$67
  Bottom 0.406: R29.2 106.05,81.28 T27.B
N$68
  Bottom 0.406: R28.2 99.69,78.74 T26.B
N$69
  Bottom 0.406: R27.2 106.05,76.2 T25.B
N$70
  Bottom 0.406: T33.C 109.86,96.52 112.39,93.98 112.39,91.12 113.35,90.17 SV2.3
N$71
  Bottom 0.406: SV2.6 116.2,88.9 113.35,88.9 111.44,90.81 111.44,93.66 109.86,95.25 T32.C
N$72
  Bottom 0.406: T31.C 109.86,91.12 113.35,87.63 SV2.5
N$73
  Bottom 0.406: T26.C 111.12,80.01 112.39,81.28 116.2,81.28 SV2.12
N$74
  Bottom 0.406: T27.C SV2.9
N$75
  Bottom 0.406: R12.1 IC1.7
N$76
  Bottom 0.406: R11.1 IC1.6
N$77
  Bottom 0.406: R10.1 IC1.5
N$78
  Bottom 0.406: R9.1 IC1.4
N$79
  Bottom 0.406: R8.1 IC1.3
N$80
  Bottom 0.406: IC1.2 R7.1
N$81
  Bottom 0.406: R6.1 IC1.1
N$82
  Bottom 0.406: R5.1 38.73,86.36 37.47,87.63 34.29,87.63 33.66,88.27 33.66,90.17 32.38,91.44 IC1.15
N$83
  Bottom 0.406: T30.C 109.22,90.17 113.03,86.36 116.2,86.36 SV2.8
N$84
  Bottom 0.406: IC2.7 R4.1
N$85
  Bottom 0.406: IC2.6 R3.1
N$86
  Bottom 0.406: IC2.5 R2.1
N$87
  Bottom 0.406: IC2.4 R1.1
N$88
  Bottom 0.406: IC2.3 R25.1
N$89
  Bottom 0.406: IC2.2 R24.1
N$90
  Bottom 0.406: IC2.1 R23.1
N$91
  Bottom 0.406: R22.1 38.73,66.04 37.47,67.31 34.29,67.31 33.66,67.95 33.66,69.85 32.38,71.12 IC2.15
N$92
  Bottom 0.406: IC3.7 R21.1
N$93
  Bottom 0.406: IC3.6 R20.1
N$94
  Bottom 0.406: IC3.5 R19.1
N$95
  Bottom 0.406: IC3.4 R18.1
N$96
  Bottom 0.406: R17.1 IC3.3
N$97
  Bottom 0.406: IC3.2 R16.1
N$98
  Bottom 0.406: R15.1 IC3.1
N$99
  Bottom 0.406: R14.1 34.92,45.72 33.66,46.99 33.66,49.53 32.38,50.8 IC3.15
N$100
  Bottom 0.406: T29.C 109.86,87 111.76,85.09 SV2.7
N$101
  Bottom 0.406: SV2.10 116.2,83.82 111.12,83.82 109.86,85.09 T28.C
N$102
  Bottom 0.406: R51.2 99.69,73.66 T48.B
N$103
  Bottom 0.406: R50.2 106.05,71.12 T47.B
N$104
  Bottom 0.406: R49.2 99.69,68.58 T46.B
N$105
  Bottom 0.406: R48.2 106.05,66.04 T45.B
N$106
  Bottom 0.406: R47.2 99.69,63.5 T44.B
N$107
  Bottom 0.406: R46.2 106.05,60.96 T43.B
N$108
  Bottom 0.406: R45.2 99.69,58.42 T42.B
N$109
  Bottom 0.406: R44.2 106.05,55.88 T41.B
N$110
  Bottom 0.406: R43.2 99.69,53.34 T40.B
N$111
  Bottom 0.406: R42.2 106.05,50.8 T39.B
N$112
  Bottom 0.406: R41.2 99.69,48.26 T38.B
N$113
  Bottom 0.406: R40.2 106.05,45.72 T37.B
N$114
  Bottom 0.406: T48.C 109.86,74.93 111.12,76.2 116.2,76.2 SV2.16
N$115
  Bottom 0.406: T47.C 109.86,73.03 111.76,74.93 SV2.15
N$116
  Bottom 0.406: T46.C 109.86,69.85 113.67,73.66 116.2,73.66 SV2.18
N$117
  Bottom 0.406: T45.C 109.86,67.95 114.3,72.39 SV2.17
N$118
  Bottom 0.406: T44.C 109.86,64.77 SV2.19
N$119
  Bottom 0.406: T43.C SV2.21
N$120
  Bottom 0.406: T37.C 109.86,48.26 120.65,59.05 120.65,68.58 119.38,69.85 SV2.20
N$121
  Bottom 0.406: T38.C 109.22,49.53 119.7,60.01 119.7,66.36 118.75,67.31 SV2.22
N$122
  Bottom 0.406: T39.C 118.75,60.96 118.75,64.14 118.11,64.77 SV2.24
N$123
  Bottom 0.406: T42.C 109.86,59.69 SV2.23
N$124
  Bottom 0.406: T41.C SV2.25
N$125
  Bottom 0.406: T40.C 109.86,54.61 SV2.26
N$126
  Bottom 0.406: R38.1 IC4.7
N$127
  Bottom 0.406: IC4.6 R37.1
N$128
  Bottom 0.406: IC4.5 R36.1
N$129
  Bottom 0.406: R35.1 IC4.4
N$130
  Bottom 0.406: IC4.3 R34.1
N$131
  Bottom 0.406: R33.1 IC4.2
N$132
  Bottom 0.406: IC4.1 R32.1
N$133
  Bottom 0.406: IC4.15 81.28,91.44 82.55,90.17 82.55,88.27 83.19,87.63 87,87.63 R31.1
N$134
  Bottom 0.406: R30.1 IC5.7
N$135
  Bottom 0.406: IC5.6 R29.1
N$136
  Bottom 0.406: R28.1 IC5.5
N$137
  Bottom 0.406: IC5.4 R27.1
N$138
  Bottom 0.406: R51.1 IC5.3
N$139
  Bottom 0.406: IC5.2 R50.1
N$140
  Bottom 0.406: R49.1 IC5.1
N$141
  Bottom 0.406: R48.1 87.63,66.04 86.36,67.31 83.19,67.31 82.55,67.95 82.55,69.85 81.28,71.12 IC5.15
N$142
  Bottom 0.406: IC6.7 R47.1
N$143
  Bottom 0.406: R46.1 IC6.6
N$144
  Bottom 0.406: IC6.5 R45.1
N$145
  Bottom 0.406: R44.1 IC6.4
N$146
  Bottom 0.406: IC6.3 R43.1
N$147
  Bottom 0.406: R42.1 IC6.2
N$148
  Bottom 0.406: IC6.1 R41.1
N$149
  Bottom 0.406: IC6.15 81.92,50.8 82.55,50.16 82.55,47.62 83.19,46.99 87,46.99 R40.1
N$150
  Bottom 0.406: N1.A 34.29,130.49 39.69,135.89 41.27,135.89 43.18,133.98 43.18,117.48 SV4.13
N$151  (via drill 0.6 pad 1.42)
  Top 0.406: v81.92,106.68 v81.92,73.66
  Bottom 0.406: IC4.9 v81.92,106.68 | v81.92,73.66 IC5.14
N$152  (via drill 0.6 pad 1.42)
  Top 0.406: v78.74,85.09 v78.74,54.61
  Bottom 0.406: IC5.9 78.11,86.36 78.74,85.73 v78.74,85.09 | IC6.14 78.11,53.34 78.74,53.98 v78.74,54.61
N$153  (via drill 0.6 pad 1.42)
  Top 0.406: v74.3,54.61 v74.3,45.09 | v123.19,82.55 v123.19,57.15
  Bottom 0.406: IC7.14 124.46,93.98 123.19,92.71 v123.19,82.55 | IC6.9 80.33,66.04 81.6,64.77 81.6,58.1 80.64,57.15 74.93,57.15 74.3,56.52 v74.3,54.61 | v123.19,57.15 120.65,57.15 111.76,48.26 111.76,45.72 110.49,44.45 74.93,44.45 v74.3,45.09
N$154
  Bottom 0.406: SV4.14 44.45,135.25 48.9,139.7 53.98,139.7 54.61,139.06 N2.A
N$155  (23 unrouted)
  Bottom 0.406: N1.RHDP 31.41,125.43 35.56,121.29 35.56,117.48 SV4.7 | N1.9 40.64,131.13 40.64,117.48 SV4.11 | N2.4 50.06,137.16 48.26,137.16 45.72,134.62 45.72,117.48 SV4.15 | SV4.16 46.99,132.44 N2.3 | SV4.17 48.26,117.48 48.26,131.13 N2.2 | SV4.18 49.53,128.55 N2.1 | SV4.19 50.8,117.48 50.8,125.73 51.67,126.6 N2.RHDP | SV4.20 52.07,124.46 53.18,125.57 53.18,138.14 N2.5 | N2.6 56.09,125.31 54.61,123.83 SV4.22 | SV4.21 55.88,117.48 55.88,123.19 57.78,125.09 57.78,126.3 N2.LHDP | SV4.24 57.15,122.56 59.69,125.09 59.69,128.55 N2.0 | SV4.23 58.42,117.48 58.42,121.92 60.96,124.46 60.96,131.13 N2.9 | SV4.26 59.69,121.29 62.23,123.83 62.23,132.44 N2.8 | SV4.25 60.96,117.48 60.96,120.65 63.5,123.19 63.5,133.98 60.96,136.52 58.9,136.52 N2.7 | N1.7 37.65,136.71 32.86,131.92 32.86,125.25 36.83,121.29 SV4.8 | N1.6 35.56,137.88 35.56,136.52 31.43,132.4 31.43,128.75 29.84,127.16 29.84,125.73 34.29,121.29 SV4.6 | N1.1 28.87,128.56 28.57,128.27 28.57,125.73 33.02,121.29 33.02,117.48 SV4.5 | N1.2 27.3,130.49 27.3,125.73 31.75,121.29 SV4.4 | N1.3 27.59,134.27 26.35,133.03 26.35,125.41 30.48,121.29 30.48,117.48 SV4.3 | N1.4 28.13,136.71 25.4,133.98 25.4,125.09 29.21,121.29 SV4.2 | N1.5 27.6,138.09 24.45,134.94 24.45,124.78 27.94,121.29 27.94,117.48 SV4.1 | SV4.12 41.91,133.35 40.98,134.27 N1.8 | N1.0 39.38,118.76 SV4.10 | N1.LHDP 37.17,126.66 38.1,125.73 38.1,117.48 SV4.9
N$156  (via drill 2)
  other vias: 24.13,139.06
N$157
  Bottom 0.406: T25.C 112.39,77.47 SV2.11
N$158
  Bottom 0.406: R52.1 119.7,98.74 119.7,78.74 118.43,77.47 SV2.14
N$159
  Bottom 0.406: R39.1 118.75,97.16 118.75,79.38 118.11,78.74 116.2,78.74 SV2.13
N$160
  Bottom 0.406: T36.C 109.86,105.41 111.76,103.51 111.76,100.97 113.67,99.06 113.67,97.16 117.47,93.34 SV2.2
N$161
  Bottom 0.406: T35.C 109.86,101.6 112.71,98.74 112.71,96.52 114.94,94.3 SV2.1
N$162
  Bottom 0.406: SV2.4 116.2,91.44 113.67,91.44 113.35,91.76 113.35,94.3 111.76,95.89 111.76,98.43 109.86,100.33 T34.C
N$163
  Bottom 0.406: R64.2 148.59,104.14 T60.B
N$164
  Bottom 0.406: R63.2 154.94,101.6 T59.B
N$165
  Bottom 0.406: R62.2 148.59,99.06 T58.B
N$166
  Bottom 0.406: R61.2 154.94,96.52 T57.B
N$167
  Bottom 0.406: R60.2 148.59,93.98 T56.B
N$168
  Bottom 0.406: R59.2 154.94,91.44 T55.B
N$169
  Bottom 0.406: R58.2 148.59,88.9 T54.B
N$170
  Bottom 0.406: R57.2 154.94,86.36 T53.B
N$171
  Bottom 0.406: R56.2 148.59,83.82 T52.B
N$172
  Bottom 0.406: R55.2 154.94,81.28 T51.B
N$173
  Bottom 0.406: R54.2 148.59,78.74 T50.B
N$174
  Bottom 0.406: R53.2 154.94,76.2 T49.B
N$175
  Bottom 0.406: T57.C 158.75,96.52 161.29,93.98 161.29,91.12 162.24,90.17 SV3.3
N$176
  Bottom 0.406: T56.C 158.75,95.25 160.34,93.66 160.34,90.81 162.24,88.9 165.1,88.9 SV3.6
N$177
  Bottom 0.406: T55.C 158.75,91.12 162.24,87.63 SV3.5
N$178
  Bottom 0.406: T50.C 158.75,80.01 160.02,81.28 165.1,81.28 SV3.12
N$179
  Bottom 0.406: T51.C SV3.9
N$180
  Bottom 0.406: T54.C 158.12,90.17 161.93,86.36 165.1,86.36 SV3.8
N$181
  Bottom 0.406: T53.C 158.75,87 160.66,85.09 SV3.7
N$182
  Bottom 0.406: T52.C 158.75,85.09 160.02,83.82 165.1,83.82 SV3.10
N$183
  Bottom 0.406: R77.2 148.59,73.66 T72.B
N$184
  Bottom 0.406: R76.2 154.94,71.12 T71.B
N$185
  Bottom 0.406: R75.2 148.59,68.58 T70.B
N$186
  Bottom 0.406: R74.2 154.94,66.04 T69.B
N$187
  Bottom 0.406: R73.2 148.59,63.5 T68.B
N$188
  Bottom 0.406: R72.2 154.94,60.96 T67.B
N$189
  Bottom 0.406: R71.2 148.59,58.42 T66.B
N$190
  Bottom 0.406: R70.2 154.94,55.88 T65.B
N$191
  Bottom 0.406: R69.2 148.59,53.34 T64.B
N$192
  Bottom 0.406: R68.2 154.94,50.8 T63.B
N$193
  Bottom 0.406: R67.2 148.59,48.26 T62.B
N$194
  Bottom 0.406: R66.2 154.94,45.72 T61.B
N$195
  Bottom 0.406: T72.C 159.38,74.93 160.66,76.2 165.1,76.2 SV3.16
N$196
  Bottom 0.406: T71.C 161.29,74.93 SV3.15
N$197
  Bottom 0.406: T70.C 158.12,69.85 161.93,73.66 165.1,73.66 SV3.18
N$198
  Bottom 0.406: T69.C 158.75,68.58 162.56,72.39 SV3.17
N$199
  Bottom 0.406: T68.C 158.75,64.77 SV3.19
N$200
  Bottom 0.406: T67.C SV3.21
N$201
  Bottom 0.406: T61.C 158.75,48.26 169.54,59.05 169.54,68.58 168.28,69.85 SV3.20
N$202
  Bottom 0.406: T62.C 158.12,49.53 168.59,60.01 168.59,66.36 167.64,67.31 SV3.22
N$203
  Bottom 0.406: T63.C 167.64,60.96 167.64,63.5 SV3.24
N$204
  Bottom 0.406: T66.C 158.75,59.69 SV3.23
N$205
  Bottom 0.406: T65.C SV3.25
N$206
  Bottom 0.406: T64.C 158.75,54.61 SV3.26
N$207
  Bottom 0.406: R64.1 IC7.7
N$208
  Bottom 0.406: IC7.6 R63.1
N$209
  Bottom 0.406: R62.1 IC7.5
N$210
  Bottom 0.406: IC7.4 R61.1
N$211
  Bottom 0.406: R60.1 IC7.3
N$212
  Bottom 0.406: IC7.2 R59.1
N$213
  Bottom 0.406: R58.1 IC7.1
N$214
  Bottom 0.406: IC7.15 130.18,91.44 131.44,90.17 131.44,88.27 132.08,87.63 135.89,87.63 R57.1
N$215
  Bottom 0.406: IC8.7 R56.1
N$216
  Bottom 0.406: R55.1 IC8.6
N$217
  Bottom 0.406: IC8.5 R54.1
N$218
  Bottom 0.406: R53.1 IC8.4
N$219
  Bottom 0.406: IC8.3 R77.1
N$220
  Bottom 0.406: R76.1 IC8.2
N$221
  Bottom 0.406: IC8.1 R75.1
N$222
  Bottom 0.406: IC8.15 130.18,71.12 131.44,69.85 131.44,67.95 132.08,67.31 135.89,67.31 R74.1
N$223
  Bottom 0.406: IC9.7 R73.1
N$224
  Bottom 0.406: R72.1 IC9.6
N$225
  Bottom 0.406: IC9.5 R71.1
N$226
  Bottom 0.406: R70.1 IC9.4
N$227
  Bottom 0.406: IC9.3 R69.1
N$228
  Bottom 0.406: R68.1 IC9.2
N$229
  Bottom 0.406: IC9.1 R67.1
N$230
  Bottom 0.406: IC9.15 130.81,50.8 131.44,50.16 131.44,47.62 132.08,46.99 135.89,46.99 R66.1
N$231  (via drill 2)
  other vias: 24.13,116.84
N$232  (via drill 0.6 pad 1.42)
  Top 0.406: v130.81,73.66 v130.81,106.68
  Bottom 0.406: IC7.9 v130.81,106.68 | IC8.14 v130.81,73.66
N$233  (via drill 0.6 pad 1.42)
  Top 0.406: v127.64,85.09 v127.64,52.07
  Bottom 0.406: IC8.9 127,86.36 127.64,85.73 v127.64,85.09 | IC9.14 127,53.34 127.64,52.7 v127.64,52.07
N$234  (via drill 2)
  other vias: 64.77,139.06
N$235  (via drill 2)
  other vias: 64.77,116.84
N$236
  Bottom 0.406: N3.A 74.93,130.49 80.33,135.89 81.92,135.89 83.82,133.98 83.82,117.48 SV5.13
N$237
  Bottom 0.406: SV5.14 85.09,135.25 89.53,139.7 94.61,139.7 95.25,139.06 N4.A
N$238
  Bottom 0.406: T49.C 161.29,80.01 SV3.11
N$239
  Bottom 0.406: R78.1 167.64,96.2 168.59,95.25 168.59,78.74 167.32,77.47 SV3.14
N$240
  Bottom 0.406: R65.1 167.64,94.62 167.64,79.38 167,78.74 165.1,78.74 SV3.13
N$241
  Bottom 0.406: T60.C 158.75,105.41 160.66,103.51 160.66,100.97 162.56,99.06 162.56,97.16 166.37,93.34 SV3.2
N$242
  Bottom 0.406: T59.C 158.75,101.6 161.61,98.74 161.61,96.52 163.83,94.3 SV3.1
N$243
  Bottom 0.406: T58.C 158.75,100.33 160.66,98.43 160.66,95.89 162.24,94.3 162.24,91.76 162.56,91.44 165.1,91.44 SV3.4
N$244  (23 unrouted)
  Bottom 0.406: N3.RHDP 72.05,125.43 76.2,121.29 76.2,117.48 SV5.7 | N3.9 81.28,131.13 81.28,117.48 SV5.11 | N4.4 90.7,137.16 88.9,137.16 86.36,134.62 86.36,117.48 SV5.15 | SV5.16 87.63,132.44 N4.3 | SV5.17 88.9,117.48 88.9,131.13 N4.2 | SV5.18 90.17,128.55 N4.1 | SV5.19 91.44,117.48 91.44,125.73 92.31,126.6 N4.RHDP | SV5.20 92.71,124.46 93.82,125.57 93.82,138.14 N4.5 | N4.6 96.73,125.31 95.25,123.83 SV5.22 | SV5.21 96.52,117.48 96.52,123.19 98.42,125.09 98.42,126.3 N4.LHDP | SV5.24 97.79,122.56 100.33,125.09 100.33,128.55 N4.0 | SV5.23 99.06,117.48 99.06,121.92 101.6,124.46 101.6,131.13 N4.9 | SV5.26 100.33,121.29 102.87,123.83 102.87,132.44 N4.8 | SV5.25 101.6,117.48 101.6,120.65 104.14,123.19 104.14,133.98 101.6,136.52 99.54,136.52 N4.7 | N3.7 78.29,136.71 73.5,131.92 73.5,125.25 77.47,121.29 SV5.8 | N3.6 76.2,137.88 76.2,136.52 72.07,132.4 72.07,128.75 70.48,127.16 70.48,125.73 74.93,121.29 SV5.6 | N3.1 69.51,128.56 69.22,128.27 69.22,125.73 73.66,121.29 73.66,117.48 SV5.5 | N3.2 67.94,130.49 67.94,125.73 72.39,121.29 SV5.4 | N3.3 68.23,134.27 66.99,133.03 66.99,125.41 71.12,121.29 71.12,117.48 SV5.3 | N3.4 68.77,136.71 66.04,133.98 66.04,125.09 69.85,121.29 SV5.2 | N3.5 68.24,138.09 65.09,134.94 65.09,124.78 68.58,121.29 68.58,117.48 SV5.1 | SV5.12 82.55,133.35 81.62,134.27 N3.8 | N3.0 80.02,118.76 SV5.10 | N3.LHDP 77.81,126.66 78.74,125.73 78.74,117.48 SV5.9
N$245  (via drill 2)
  other vias: 105.41,139.06 146.05,139.06 146.05,116.84
N$246  (via drill 2)
  other vias: 105.41,116.84
N$247
  Bottom 0.406: N5.A 115.57,130.49 120.97,135.89 122.56,135.89 124.46,133.98 124.46,117.48 SV6.13
N$248
  Bottom 0.406: SV6.14 125.73,135.25 130.18,139.7 135.25,139.7 135.89,139.06 N6.A
N$249  (23 unrouted)
  Bottom 0.406: N5.RHDP 112.69,125.43 116.84,121.29 116.84,117.48 SV6.7 | N5.9 121.92,131.13 121.92,117.48 SV6.11 | N6.4 131.34,137.16 129.54,137.16 127,134.62 127,117.48 SV6.15 | SV6.16 128.27,132.44 N6.3 | SV6.17 129.54,117.48 129.54,131.13 N6.2 | SV6.18 130.81,128.55 N6.1 | SV6.19 132.08,117.48 132.08,125.73 132.95,126.6 N6.RHDP | SV6.20 133.35,124.46 134.46,125.57 134.46,137.51 N6.5 | N6.6 137.37,125.31 135.89,123.83 SV6.22 | SV6.21 137.16,117.48 137.16,123.19 139.06,125.09 139.06,126.3 N6.LHDP | SV6.24 138.43,122.56 140.97,125.09 140.97,128.55 N6.0 | SV6.23 139.7,117.48 139.7,121.92 142.24,124.46 142.24,131.13 N6.9 | SV6.26 140.97,121.29 143.51,123.83 143.51,132.44 N6.8 | SV6.25 142.24,117.48 142.24,120.65 144.78,123.19 144.78,133.98 142.24,136.52 140.18,136.52 N6.7 | N5.7 118.93,136.71 114.14,131.92 114.14,125.25 118.11,121.29 SV6.8 | N5.6 116.84,137.88 116.84,136.52 112.71,132.4 112.71,128.75 111.12,127.16 111.12,125.73 115.57,121.29 SV6.6 | N5.1 110.15,128.56 109.86,128.27 109.86,125.73 114.3,121.29 114.3,117.48 SV6.5 | N5.2 108.58,130.49 108.58,125.73 113.03,121.29 SV6.4 | N5.3 108.88,134.27 107.63,133.03 107.63,125.41 111.76,121.29 111.76,117.48 SV6.3 | N5.4 109.41,136.71 106.68,133.98 106.68,125.09 110.49,121.29 SV6.2 | N5.5 108.88,138.09 105.73,134.94 105.73,124.78 109.22,121.29 109.22,117.48 SV6.1 | SV6.12 123.19,133.35 122.27,134.27 N5.8 | N5.0 120.66,118.76 SV6.10 | N5.LHDP 118.45,126.66 119.38,125.73 119.38,117.48 SV6.9
RCK  (via drill 0.6 pad 1.42)
  Top 0.406: v70.48,108.27 v75.88,108.27
  Bottom 0.406: 70.48,107.95 26.04,107.95 24.13,106.05 24.13,99.06 | 73.03,99.06 73.03,100.97 71.75,102.23 71.75,106.68 70.48,107.95 | 73.03,99.06 73.03,78.74 | 73.03,78.74 73.03,72.39 71.75,71.12 71.75,58.42 | 71.75,58.42 IC6.12 | IC4.12 73.03,99.06 | IC5.12 73.03,78.74 | 25.4,99.06 IC1.12 24.13,99.06 | 24.13,99.06 24.13,78.74 | 24.13,78.74 24.13,59.69 25.4,58.42 IC3.12 | 71.75,58.42 71.75,55.24 68.58,52.07 J1.2 | IC7.12 120.65,99.06 | 120.65,99.06 120.65,100.01 120.02,100.65 116.52,100.65 109.22,107.95 76.2,107.95 v75.88,108.27 | IC8.12 120.65,78.74 | 120.65,78.74 120.65,99.06 | IC9.12 123.19,58.42 121.92,59.69 121.92,69.85 120.65,71.12 120.65,78.74 | IC2.12 24.13,78.74 | v70.48,108.27 70.48,107.95
SCK  (via drill 0.6 pad 1.42)
  Top 0.406: v25.4,109.22 v25.4,102.87 | v73.03,59.69 v73.03,57.15 | v73.03,109.22 v77.79,109.22
  Bottom 0.406: v25.4,109.22 58.42,109.22 59.05,108.59 66.04,108.59 67.31,109.86 72.39,109.86 v73.03,109.22 73.03,103.51 74.93,101.6 IC4.11 78.11,101.6 78.74,100.97 78.74,98.43 78.11,97.79 74.93,97.79 73.98,96.84 73.98,82.23 74.93,81.28 IC5.11 78.11,81.28 78.74,80.65 78.74,78.11 78.11,77.47 74.93,77.47 73.98,76.52 73.98,71.12 73.03,69.85 73.03,60.96 | IC6.11 73.03,60.96 | IC3.11 26.04,60.96 25.08,61.91 25.08,76.52 26.04,77.47 29.21,77.47 29.84,78.11 29.84,80.65 29.21,81.28 IC2.11 26.04,81.28 25.08,82.23 25.08,96.84 26.04,97.79 29.21,97.79 29.84,98.43 29.84,100.33 28.57,101.6 IC1.11 26.04,101.6 25.4,102.23 v25.4,102.87 | 73.03,60.96 v73.03,59.69 | v77.79,109.22 109.86,109.22 117.47,101.6 IC7.11 127,101.6 127.64,100.97 127.64,98.43 127,97.79 122.56,97.79 121.6,96.84 121.6,82.23 122.56,81.28 IC8.11 127,81.28 127.64,80.65 127.64,78.11 127,77.47 123.83,77.47 122.87,76.52 122.87,61.91 123.83,60.96 IC9.11 | v73.03,57.15 73.03,54.61 71.12,52.7 J1.1
SER  (via drill 0.6 pad 1.42)
  Top 0.406: v63.5,46.35 63.5,41.91 23.18,41.91 23.18,92.71 v29.84,92.71
  Bottom 0.406: v63.5,46.35 64.77,47.62 J1.3 | IC1.14 29.21,93.98 29.84,93.34 v29.84,92.71
VCC  (via drill 0.6 pad 1.42)
  Top 0.406: v31.43,98.43 v31.43,89.54 | v31.43,78.11 v31.43,68.58 | v31.43,48.26 v31.43,63.5 | v80.33,98.43 v80.33,90.17 | v80.33,63.5 v80.33,48.26 | v80.33,68.58 v80.33,78.11 | v31.43,110.49 v31.43,105.41 | v62.23,110.49 v62.23,105.73 | v129.22,90.17 v129.22,98.43 | v129.22,78.11 v129.22,68.58 | v129.22,48.26 v129.22,63.5
  Bottom 0.406: v31.43,68.58 IC2.16 26.67,68.58 26.04,67.95 26.04,64.14 26.67,63.5 IC3.10 v31.43,63.5 | IC3.16 v31.43,48.26 | IC6.10 v80.33,63.5 75.56,63.5 74.93,64.14 74.93,67.95 75.56,68.58 IC5.16 v80.33,68.58 | 74.61,110.49 74.61,105.09 75.56,104.14 IC4.10 79.06,104.14 80.33,102.87 v80.33,98.43 | v31.43,110.49 v62.23,110.49 74.61,110.49 | IC1.10 31.43,104.14 | 31.43,104.14 v31.43,105.41 | v31.43,98.43 31.43,104.14 | v80.33,48.26 IC6.16 | v31.43,89.54 31.43,88.9 | 31.43,88.9 31.43,83.82 | 31.43,83.82 v31.43,78.11 | IC1.16 31.43,88.9 | IC2.10 31.43,83.82 | v80.33,90.17 80.33,88.9 | 80.33,88.9 80.33,83.82 | 80.33,83.82 v80.33,78.11 | IC4.16 80.33,88.9 | IC5.10 80.33,83.82 | v62.23,105.73 63.82,104.14 J2.3 | 74.61,110.49 110.49,110.49 116.84,104.14 IC7.10 127.95,104.14 129.22,102.87 v129.22,98.43 | IC7.16 129.22,88.9 | 129.22,88.9 129.22,83.82 | IC8.10 129.22,83.82 | 129.22,83.82 v129.22,78.11 | v129.22,90.17 129.22,88.9 | v129.22,68.58 IC8.16 124.46,68.58 123.83,67.95 123.83,64.14 124.46,63.5 IC9.10 v129.22,63.5 | IC9.16 v129.22,48.26

## Text on the board
Bottom: KJ-3 | v2 | v2 | KJ-3